# EAGLE board Fantastic Albar (EAGLE 7.6.0)

Size 73.58 x 63.39 mm. Coordinates in mm from the lower left corner, seen from the top.
Outline: 0,0 56.82,0 56.82,53.33 0,53.33 0,0
Copper layers (1*16): Top 0.035mm / dielectric 1.5mm / Bottom 0.035mm
Design rules "default": minimum track width 10mil, minimum drill 24mil, track to track 8mil, track to pad 8mil, pad to pad 8mil, via to via 8mil, smd to smd 8mil, copper to edge 40mil, drill to drill 8mil, minimum pad ring 10mil, minimum via ring 8mil, stop-mask expansion 4mil, vias tented up to drill 0mil, thermal gap 10mil

## Footprints (pad centres in the part's own frame; a part is rotated, then mirrored left to right if it is on the bottom)
LED-RGB-THRU = drill 0.762 pad 0.889 long: 1 1.905,0; 2 0.635,0; 3 -0.635,0; 4 -1.905,0
LED5MM = drill 0.813 octagon: A -1.27,0; K 1.27,0
HDSP-M = drill 0.813 long: 1 -5.08,-7.62; 2 -2.54,-7.62; 3 0,-7.62; 4 2.54,-7.62; 5 5.08,-7.62; 6 5.08,7.62; 7 2.54,7.62; 8 0,7.62; 9 -2.54,7.62; 10 -5.08,7.62
PIEZO-22MM = drill 1 pad 2.54: P$1 -5,0; P$2 5,0
0207/10 = drill 0.813 octagon: 1 -5.08,0; 2 5.08,0
TL1105 = drill 1 pad 1.676: 1 -2.25,3.25; 2 2.25,3.25; 3 -2.25,-3.25; 4 2.25,-3.25
1X3P-2.54-2.54-11.6-3.0-BLACK-MALE = drill 0.889 pad 1.651 square: 1 0,2.54 | drill 0.889 pad 1.651: 2 0,0; 3 0,-2.54
ARDUINO_UNO = drill 1.016 pad 1.88: 0 63.5,50.8; 1 60.96,50.8; 2 58.42,50.8; 3 55.88,50.8; 3.3V 35.56,2.54; 4 53.34,50.8; 5 50.8,50.8; 5V 38.1,2.54; 6 48.26,50.8; 7 45.72,50.8; 8 41.656,50.8; 9 39.116,50.8; 10 36.576,50.8; 11 34.036,50.8; 12 31.496,50.8; 13 28.956,50.8; A0 50.8,2.54; A1 53.34,2.54; A2 55.88,2.54; A3 58.42,2.54; A4 60.96,2.54; A5 63.5,2.54; AREF 23.876,50.8; GND 26.416,50.8; GND. 43.18,2.54; GND.. 40.64,2.54; I/OREF 30.48,2.54; N/C 27.94,2.54; RESET 33.02,2.54; SCL 18.796,50.8; SDA 21.336,50.8; VIN 45.72,2.54 | hole 3.2: 66.04,7.62; 66.04,35.56; 15.24,50.8; 13.97,2.54
1X16P-2.54-2.54-11.6-3.0-BLACK-MALE = drill 0.889 pad 1.651 square: 1 0,19.05 | drill 0.889 pad 1.651: 2 0,16.51; 3 0,13.97; 4 0,11.43; 5 0,8.89; 6 0,6.35; 7 0,3.81; 8 0,1.27; 9 0,-1.27; 10 0,-3.81; 11 0,-6.35; 12 0,-8.89; 13 0,-11.43; 14 0,-13.97; 15 0,-16.51; 16 0,-19.05
DIL16 = drill 0.813 long: 1 -8.89,-3.81; 2 -6.35,-3.81; 3 -3.81,-3.81; 4 -1.27,-3.81; 5 1.27,-3.81; 6 3.81,-3.81; 7 6.35,-3.81; 8 8.89,-3.81; 9 8.89,3.81; 10 6.35,3.81; 11 3.81,3.81; 12 1.27,3.81; 13 -1.27,3.81; 14 -3.81,3.81; 15 -6.35,3.81; 16 -8.89,3.81
TO92 = drill 0.813 octagon: 1 1.27,0; 2 0,1.905; 3 -1.27,0

## Placement (x,y rotation side)
D1  [LED-RGB-THRU]  5,48.18 0 top
D2  [LED5MM]  5,60.88 0 top
Digit1  [HDSP-M]  5,111.68 0 top  (outside the outline)
Digit2  [HDSP-M]  5,124.38 0 top  (outside the outline)
Digit3  [HDSP-M]  5,137.08 0 top  (outside the outline)
Digit4  [HDSP-M]  5,149.78 0 top  (outside the outline)
PIEZO1  [PIEZO-22MM]  5,162.48 0 top  (outside the outline)
R1  220‎Ω  [0207/10]  5,22.78 0 top
R2  220‎Ω  [0207/10]  5,213.28 0 top  (outside the outline)
R3  220‎Ω  [0207/10]  5,225.98 0 top  (outside the outline)
R4  220‎Ω  [0207/10]  5,238.68 0 top  (outside the outline)
R5  220‎Ω  [0207/10]  5,251.38 0 top  (outside the outline)
S1  [TL1105]  5,35.48 0 top
SERVO1  [1X3P-2.54-2.54-11.6-3.0-BLACK-MALE]  5,73.58 0 top  (outside the outline)
SERVO2  [1X3P-2.54-2.54-11.6-3.0-BLACK-MALE]  5,86.28 0 top  (outside the outline)
U1  [ARDUINO_UNO]  5,10.08 0 top
U2  [1X16P-2.54-2.54-11.6-3.0-BLACK-MALE]  5,98.98 0 top  (outside the outline)
U3  [DIL16]  5,175.18 0 top  (outside the outline)
U4  [DIL16]  5,200.58 0 top  (outside the outline)
U5  [TO92]  5,187.88 0 top  (outside the outline)

## Library data of the parts
D1 D2 Digit1-Digit4 PIEZO1 R1-R5 S1 SERVO1 SERVO2 U1-U5 = AUTODESK_CIRCUITS_BREADBOARD

## Nets
N$1: Digit2.3 U3.1
N$2: Digit3.1 U3.4
N$3: Digit3.3 U3.6
N$4: Digit3.4 U3.7
N$5: Digit2.4 U3.2
N$6: U3.13 U4.13
N$7: Digit3.2 U3.5
N$8: U3.14
N$9: U3.15
N$10: Digit2.5 U3.3
N$11: U3.9 U4.14
N$12: U3.8 U4.8
N$13: U4.4
N$14: U4.6
N$15: U4.7
N$16: U4.5
N$17: U4.15
N$18: U4.9
N$19: U3.11 U3.12 U4.11 U4.12
N$20: R1.2 U4.3
N$21: Digit3.9 R1.1
N$22: R2.2 U4.2
N$23: Digit3.10 R2.1
N$24: R3.2 U4.1
N$25: Digit2.6 R3.1
N$26: Digit2.2 R4.2 U3.10 U3.16 U4.10 U4.16
N$27: Digit2.7 R4.1

## Tracks (layer width: path | path; a pad name or v marks a point on that pad's centre or on a via)
N$1  (1 unrouted)
N$2  (1 unrouted)
N$3  (1 unrouted)
N$4  (1 unrouted)
N$5  (1 unrouted)
N$6  (1 unrouted)
N$7  (1 unrouted)
N$10  (1 unrouted)
N$11  (1 unrouted)
N$12  (1 unrouted)
N$19  (3 unrouted)
N$20  (1 unrouted)
N$21  (1 unrouted)
N$22  (1 unrouted)
N$23  (1 unrouted)
N$24  (1 unrouted)
N$25  (1 unrouted)
N$26  (5 unrouted)
N$27  (1 unrouted)